# EAGLE board masterV05a (EAGLE 6.1), part 1 of 2
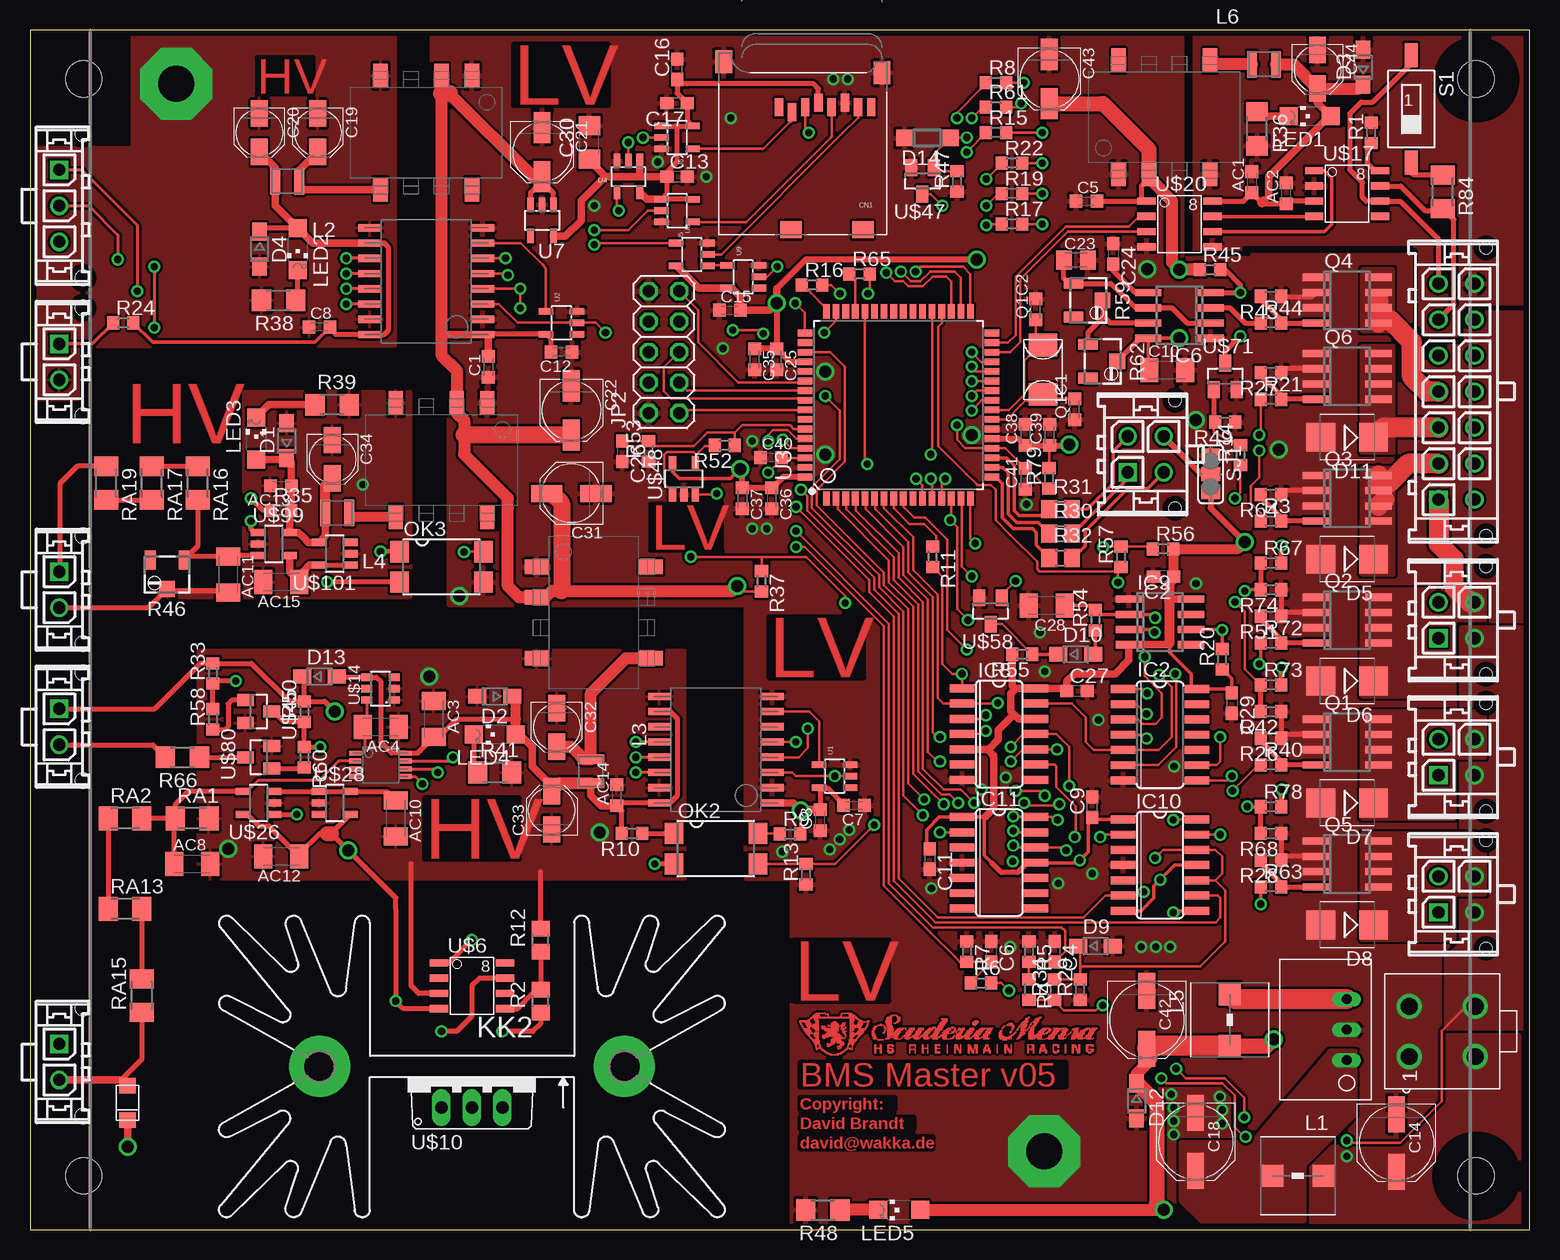
[diagram p0: board, top side]
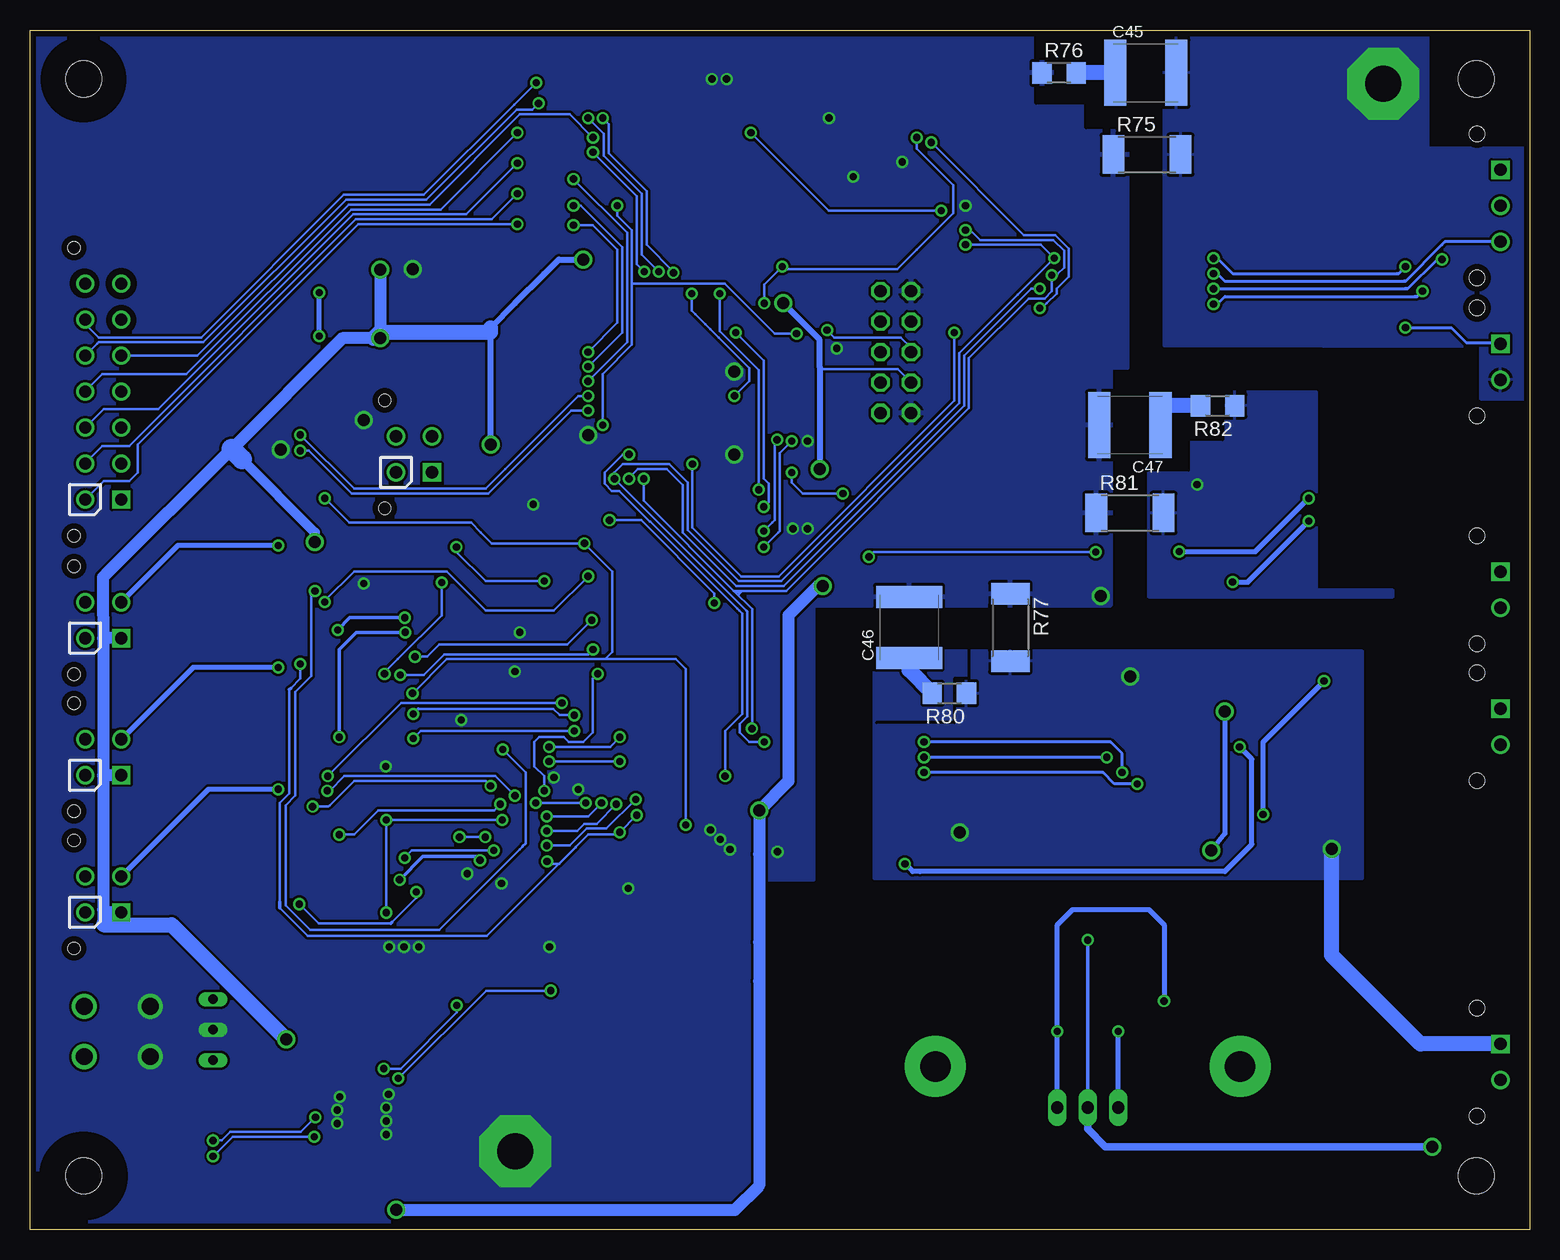
[diagram p1: board, bottom side, seen from below]

Size 124.98 x 100 mm. Coordinates in mm from the lower left corner, seen from the top.
Outline: 0,0 124.98,0 124.98,100 0,100 0,0
Copper layers (1*16): Top 0.035mm / dielectric 1.5mm / Bottom 0.035mm
Design rules: minimum track width 8mil, minimum drill 0.6mm, track to track 8mil, track to pad 8mil, pad to pad 8mil, via to via 8mil, smd to smd 0mil, copper to edge 20mil, drill to drill 10mil, minimum pad ring 8mil, minimum via ring 8mil, stop-mask expansion 0mil, vias tented up to drill 0mil, thermal gap 10mil
Holes 3 mm at 4.47,4.47 120.5,4.47 120.5,95.91 4.47,95.91
tRestrict: area 0.9,0.9 to 8,8; area 0.9,92.3 to 8,99.4; area 117.1,92.5 to 124,99.3; area 117,0.9 to 124.1,8; 12 lines
bRestrict: area 0.9,0.9 to 8,8; area 0.9,92.3 to 8,99.4; area 117.1,92.5 to 124,99.3; area 117,0.9 to 124.1,8; area 116.3,74.8 to 118.4,76.9; area 116.3,77.8 to 118.5,80; area 119.4,77.8 to 121.5,79.9; 19 lines

## Footprints (pad centres in the part's own frame; a part is rotated, then mirrored left to right if it is on the bottom)
C0603K = smd 1.05 x 1.08: 1 -0.875,0; 2 0.875,0
C1206K = smd 1.5 x 2: 1 -1.5,0; 2 1.5,0
C0603 = smd 1.1 x 1: 1 -0.85,0; 2 0.85,0
PANASONIC_D = smd 3 x 1.4: + 2.4,0; - -2.4,0
PANASONIC_B = smd 2.2 x 1.4: + 1.6,0; - -1.6,0
PANASONIC_C = smd 2.6 x 1.4: + 2.05,0; - -2.05,0
C0805K = smd 1.3 x 1.6: 1 -1,0; 2 1,0
C1206 = smd 1.6 x 1.8: 1 -1.4,0; 2 1.4,0
C2220K = smd 1.85 x 5.5: 1 -2.55,0; 2 2.55,0
MICROSD = smd 0.7 x 1.5: 1 9,-10.64; 2 7.9,-10.24; 3 6.8,-10.64; 4 5.7,-11.04; 5 4.6,-10.64; 6 3.5,-11.04; 7 2.4,-10.64; 8 1.3,-10.64 | smd 1.8 x 1.4: CD1 2,-0.44; CD2 8,-0.44 | smd 1.4 x 1.9: MT1 0.4,-13.54; MT2 13.6,-14.44
SOD323-W = smd 1.5 x 1.2: A 1.45,0; C -1.45,0
SMB = smd 2.4 x 2.4: A 2.2,0; C -2.2,0
SOD123 = smd 1.4 x 1.4: A 1.9,0; C -1.9,0
DO-219AB = smd 1.3 x 1.4: A -1.45,0; C 1.45,0
ISF = smd 1.2 x 2: 1 -3.81,-4.75; 2 -1.27,-4.75; 4 3.81,-4.75; 5 3.81,4.75; 8 -3.81,4.75
SO14 = smd 0.66 x 2.032: 1 -3.81,-3.073; 2 -2.54,-3.073; 3 -1.27,-3.073; 4 0,-3.073; 5 1.27,-3.073; 6 2.54,-3.073; 7 3.81,-3.073; 8 3.81,3.073; 9 2.54,3.073; 10 1.27,3.073; 11 0,3.073; 12 -1.27,3.073; 13 -2.54,3.073; 14 -3.81,3.073
SO08 = smd 0.6 x 2.2: 1 -1.905,-2.6; 2 -0.635,-2.6; 3 0.635,-2.6; 4 1.905,-2.6; 5 1.905,2.6; 6 0.635,2.6; 7 -0.635,2.6; 8 -1.905,2.6
2X05 = drill 1.016 octagon: 1 -5.08,-1.27; 2 -5.08,1.27; 3 -2.54,-1.27; 4 -2.54,1.27; 5 0,-1.27; 6 0,1.27; 7 2.54,-1.27; 8 2.54,1.27; 9 5.08,-1.27; 10 5.08,1.27
SK129 = drill 2.54 pad 5.08: A2,5 -12.7,-0.889; B2,5 12.7,-0.889
WE-PD_6033/6050_PLASTIC_BASE = smd 1.9 x 1.85: 1 -2.18,0; 2 2.18,0
WE-PMI_1008 = smd 0.8 x 2.2: 1 -1,0; 2 1,0
CHIPLED_1206 = smd 1.5 x 1.5: A 0,-1.75; C 0,1.75
SMD4 = smd 1.78 x 1.55: 1 -1.27,-3.5; 2 1.27,-3.5; 3 1.27,3.5; 4 -1.27,3.5
SO-08 = smd 0.6 x 2.2: 1 -1.905,-2.6; 2 -0.635,-2.6; 3 0.635,-2.6; 4 1.905,-2.6; 5 1.905,2.6; 6 0.635,2.6; 7 -0.635,2.6; 8 -1.905,2.6
R0603 = smd 1 x 1.1: 1 -0.85,0; 2 0.85,0
R0805 = smd 1.3 x 1.5: 1 -0.95,0; 2 0.95,0
R1206 = smd 1.6 x 1.803: 1 -1.422,0; 2 1.422,0
3223W = smd 0.9 x 1.6: 1 -1.4,-1.215; 3 1.4,-1.215 | smd 1.3 x 1.3: 2 0,1.215
R2512 = smd 1.8 x 3.2: 1 -2.8,0; 2 2.8,0
M1206 = smd 1.6 x 2: 1 -1.4,0; 2 1.4,0
SMS-001 = smd 1.092 x 2.007: 1 0,-4.496; 2 0,4.496
SJ_2 = smd 1.168 x 1.6: 1 -1.524,0; 2 0,0; 3 1.524,0
SOT23-5 = smd 0.55 x 1.2: 1 -0.95,-1.3; 2 0,-1.3; 3 0.95,-1.3; 4 0.95,1.3; 5 -0.95,1.3
TQFP64-0.8MM = smd 1.194 x 0.559: 1 -7.8,6; 2 -7.8,5.2; 3 -7.8,4.4; 4 -7.8,3.6; 5 -7.8,2.8; 6 -7.8,2; 7 -7.8,1.2; 8 -7.8,0.4; 9 -7.8,-0.4; 10 -7.8,-1.2; 11 -7.8,-2; 12 -7.8,-2.8; 13 -7.8,-3.6; 14 -7.8,-4.4; 15 -7.8,-5.2; 16 -7.8,-6; 33 7.8,-6; 34 7.8,-5.2; 35 7.8,-4.4; 36 7.8,-3.6; 37 7.8,-2.8; 38 7.8,-2; 39 7.8,-1.2; 40 7.8,-0.4; 41 7.8,0.4; 42 7.8,1.2; 43 7.8,2; 44 7.8,2.8; 45 7.8,3.6; 46 7.8,4.4; 47 7.8,5.2; 48 7.8,6 | smd 0.559 x 1.194: 17 -6,-7.8; 18 -5.2,-7.8; 19 -4.4,-7.8; 20 -3.6,-7.8; 21 -2.8,-7.8; 22 -2,-7.8; 23 -1.2,-7.8; 24 -0.4,-7.8; 25 0.4,-7.8; 26 1.2,-7.8; 27 2,-7.8; 28 2.8,-7.8; 29 3.6,-7.8; 30 4.4,-7.8; 31 5.2,-7.8; 32 6,-7.8; 49 6,7.8; 50 5.2,7.8; 51 4.4,7.8; 52 3.6,7.8; 53 2.8,7.8; 54 2,7.8; 55 1.2,7.8; 56 0.4,7.8; 57 -0.4,7.8; 58 -1.2,7.8; 59 -2,7.8; 60 -2.8,7.8; 61 -3.6,7.8; 62 -4.4,7.8; 63 -5.2,7.8; 64 -6,7.8
SOT23-DBV = smd 0.55 x 1.2: 1 -0.95,-1.3; 2 0,-1.3; 3 0.95,-1.3; 4 0.95,1.3; 5 -0.95,1.3
SO-8 = smd 1.524 x 0.61: 1 -2.743,1.905; 2 -2.743,0.635; 3 -2.743,-0.635; 4 -2.743,-1.905; 5 2.743,-1.905; 6 2.743,-0.635; 7 2.743,0.635; 8 2.743,1.905
SO16WB = smd 1.9 x 0.6: P$1 -4.7,4.445; P$2 -4.7,3.175; P$3 -4.7,1.905; P$4 -4.7,0.635; P$5 -4.7,-0.635; P$6 -4.7,-1.905; P$7 -4.7,-3.175; P$8 -4.7,-4.445; P$9 4.7,-4.445; P$10 4.7,-3.175; P$11 4.7,-1.905; P$12 4.7,-0.635; P$13 4.7,0.635; P$14 4.7,1.905; P$15 4.7,3.175; P$16 4.7,4.445
TO220V = drill 1.016 long: 1 -2.54,-2.54; 2 0,-2.54; 3 2.54,-2.54
SOT23-6 = smd 0.6 x 0.9: 1 -0.95,-1.15; 2 0,-1.15; 3 0.95,-1.15; 4 0.95,1.15; 5 0,1.15; 6 -0.95,1.15
MS8 = smd 1.016 x 0.406: P$1 -2.108,0.975; P$2 -2.108,0.325; P$3 -2.108,-0.325; P$4 -2.108,-0.975; P$5 2.108,-0.975; P$6 2.108,-0.325; P$7 2.108,0.325; P$8 2.108,0.975
SOT23-5' = smd 0.6 x 1.2: 1 -0.95,-1.306; 2 0,-1.306; 3 0.95,-1.306; 4 0.95,1.306; 5 -0.95,1.306
SOT23 = smd 1 x 1.4: 1 -0.95,-1.1; 2 0.95,-1.1; 3 0,1.1
TSR1 = drill 0.8 long: 1 -2.54,0; 2 0,0; 3 2.54,0
43650-0215 = drill 1.02 square: 1 1.5,0 | drill 1.02: 2 -1.5,0 | hole 1.27: 4.5,-1.96; -4.5,-1.96
43045-1412 = drill 1.02 square: 1 9,0 | drill 1.02: 2 6,0; 3 3,0; 4 0,0; 5 -3,0; 6 -6,0; 7 -9,0; 8 9,3; 9 6,3; 10 3,3; 11 0,3; 12 -3,3; 13 -6,3; 14 -9,3 | hole 1.02: 12,3.94; -12,3.94
43045-0412 = drill 1.02 square: 1 1.5,0 | drill 1.02: 2 -1.5,0; 3 1.5,3; 4 -1.5,3 | hole 1.02: 4.5,3.94; -4.5,3.94
43650-0315 = drill 1.02 square: 1 3,0 | drill 1.02: 2 0,0; 3 -3,0 | hole 1.27: 6,-1.96; -6,-1.96
5566-04 = drill 1.4: P1 -2.1,2.75; P2 2.1,2.75; P3 -2.1,-2.75; P4 2.1,-2.75
CX-53G = smd 1.9 x 2.4: P$1 -2.05,0; P$2 2.05,0

## Placement (x,y rotation side)
AC1  100n  [C0603K]  101.82,87.31 90 top
AC2  100n  [C0603K]  104.68,86.36 90 top
AC3  1u  [C1206K]  33.66,42.55 270 top
AC4  10u  [C1206K]  29.21,41.91 180 top
AC8  10u  [C1206K]  13.51,30.48 0 top
AC10  10u  [C1206K]  30.48,34.29 270 top
AC11  10u  [C1206K]  16.51,54.61 270 top
AC12  10u  [C1206K]  20.95,31.11 180 top
AC13  100n  [C0603K]  20.9,62 180 top
AC14  100n  [C0603K]  48.9,36.2 90 top
AC15  10u  [C1206K]  20.95,53.98 180 top
C1  100n  [C0603K]  38.2,71.93 90 top
C2  1u  [C0603]  94.47,54.46 180 top
C3  100n  [C0603K]  65.84,34.14 90 top
C4  1u  [C0603]  85.38,23.16 270 top
C5  100n  [C0603K]  88.04,85.72 0 top
C6  1u  [C0603]  80.1,23.16 270 top
C7  100n  [C0603K]  68.68,35.36 180 top
C8  100n  [C0603K]  24.13,75.25 0 top
C9  1u  [C0603]  88.53,35.21 90 top
C10  10u  [C1206K]  94.77,71.63 0 top
C11  1u  [C0603]  74.96,30.89 270 top
C12  100n  [C0603K]  44.3,73.15 180 top
C13  100n  [C0603]  53.93,87.78 0 top
C14  22u50v  [PANASONIC_D]  113.87,7.21 270 top
C15  100n  [C0603K]  58.32,76.63 0 top
C16  100n  [C0603]  53.93,96.72 90 top
C17  100n  [C0603]  53.93,93.88 180 top
C18  22u50v  [PANASONIC_D]  97.13,7.32 270 top
C19  10u16V  [PANASONIC_B]  23.98,91.44 270 top
C20  10u16V  [PANASONIC_B]  19.1,91.44 270 top
C21  33u10V  [PANASONIC_C]  42.67,89.81 270 top
C22  33u10V  [PANASONIC_C]  45.11,68.28 270 top
C23  1u  [C0805K]  87.16,80.82 0 top
C24  10n  [C0603]  90.26,81.34 270 top
C25  100n  [C0603K]  62.22,72.54 270 top
C26  1u  [C0603]  49.36,64.87 270 top
C27  1u  [C0603]  87.26,44.91 0 top
C28  2.2u  [C1206K]  84.72,52.02 180 top
C29  1u  [C0603]  100.16,43.89 270 top
C30  10u  [C1206]  46.61,90.63 90 top
C31  33u10V  [PANASONIC_C]  45.11,61.37 180 top
C32  10u16V  [PANASONIC_B]  43.89,41.86 270 top
C33  10u16V  [PANASONIC_B]  43.48,34.95 90 top
C34  10u16V  [PANASONIC_B]  25.2,64.21 270 top
C35  1u  [C0603K]  60.39,72.54 270 top
C36  100n  [C0603K]  61.81,60.96 270 top
C37  1u  [C0603K]  59.37,60.96 270 top
C38  100n  [C0603K]  82.94,66.24 90 top
C39  1u  [C0603K]  84.97,66.24 90 top
C40  1u  [C0603K]  61.76,64.36 0 top
C41  100n  [C0603K]  82.94,62.59 90 top
C42  150u10v  [PANASONIC_D]  93.07,17.48 270 top
C43  33u10V  [PANASONIC_C]  84.94,95.91 270 top
C44  10u16V  [PANASONIC_B]  107.29,96.72 270 top
C45  DNP  [C2220K]  32,96.42 0 bottom
C46  [C2220K]  51.71,50.19 90 bottom
C47  [C2220K]  33.32,67.06 180 bottom
CN1  [MICROSD]  71.4,82.91 180 top
D1  5.5  [SOD323-W]  21.39,65.76 90 top
D2  5.5  [SOD323-W]  38.73,44.45 180 top
D3  5.5  [SOD323-W]  111.1,96.89 90 top
D4  5.5  [SOD323-W]  19.13,81.74 270 top
D5  [SMB]  109.76,55.88 180 top
D6  [SMB]  109.76,45.72 180 top
D7  [SMB]  109.76,35.56 180 top
D8  [SMB]  109.76,25.4 180 top
D9  5.1  [SOD323-W]  88.8,23.64 0 top
D10  [SOD323-W]  87.15,47.96 0 top
D11  [SMB]  109.76,66.04 180 top
D12  5.5  [SOD323-W]  92.22,10.72 270 top
D13  [SOD323-W]  24.13,46.1 0 top
D14  20V  [SOD123]  74.78,91 180 top
D15  RS07J  [DO-219AB]  8.13,10.57 270 top
DC2  TES 1-0511  [ISF]  94.52,92.71 0 top
DC3  TES 1-0511  [ISF]  33.02,91.44 180 top
DC4  TES 1-0511  [ISF]  34.29,64.14 180 top
DC5  TES 1-0511  [ISF]  46.99,51.44 270 top
IC2  74AC04D  [SO14]  94.16,41.25 270 top
IC6  NE555D  [SO08]  95.79,76.2 90 top
IC8  4082D  [SO14]  80.75,41.3 270 top
IC9  NE555D  [SO08]  94.16,50.65 270 top
IC10  74AC11074D  [SO14]  94.16,30.38 270 top
IC11  74AC11074D  [SO14]  80.75,30.58 270 top
JP2  [2X05]  52.83,73.15 90 top
KK2  SK129-PAD  [SK129]  36.83,12.7 180 top
L1  7447786008  [WE-PD_6033/6050_PLASTIC_BASE]  105.66,4.47 180 top
L2  74479887310  [WE-PMI_1008]  21.44,87.38 180 top
L3  74479887310  [WE-PMI_1008]  46.74,38.2 270 top
L4  74479887310  [WE-PMI_1008]  25.6,59.74 180 top
L5  7447786008  [WE-PD_6033/6050_PLASTIC_BASE]  99.97,17.48 270 top
L6  74479887310  [WE-PMI_1008]  102.82,97.13 0 top
LED1  1318255  [CHIPLED_1206]  106.65,92.81 90 top
LED2  1318255  [CHIPLED_1206]  22.3,81.74 180 top
LED3  1318255  [CHIPLED_1206]  18.85,65.94 0 top
LED4  1318255  [CHIPLED_1206]  38.73,41.27 90 top
LED5  1318255  [CHIPLED_1206]  72.42,1.63 90 top
OK2  LTV816S  [SMD4]  57.15,31.75 270 top
OK3  LTV816S  [SMD4]  34.29,55.24 270 top
Q1  [SO-08]  109.76,40.64 270 top
Q1C1  18pf  [C0603K]  87.06,68.38 90 top
Q1C2  18pf  [C0603K]  83.81,76.71 90 top
Q2  [SO-08]  109.76,50.8 270 top
Q3  [SO-08]  109.76,60.96 270 top
Q4  [SO-08]  109.76,77.47 270 top
Q5  [SO-08]  109.76,30.48 270 top
Q6  [SO-08]  109.76,71.12 270 top
R1  1.5k  [R0603]  111.76,91.41 90 top
R2  [R0805]  42.55,19.05 90 top
R3  10  [R0603]  103.41,59.05 0 top
R4  4.7k  [R0603]  83.25,20.02 270 top
R5  680  [R0603]  83.25,23.16 270 top
R6  4.7k  [R0603]  79.25,20.56 0 top
R7  680  [R0603]  78.07,23.16 270 top
R8  1k  [R0603]  80.5,95.61 0 top
R9  100  [R0603]  63.35,32.97 0 top
R10  330  [R0603]  50.16,33.02 180 top
R11  100k  [R0603]  75.22,56.08 270 top
R12  [R0805]  42.55,24.13 90 top
R13  10k  [R0603]  64.67,29.62 90 top
R14  10k  [R0603]  100.87,64.56 90 top
R15  1k  [R0603]  80.5,91.44 0 top
R16  100k  [R0603]  65.16,78.74 0 top
R17  1k  [R0603]  81.82,83.82 0 top
R19  1k  [R0603]  81.82,86.36 0 top
R20  100k  [R0603]  99.35,47.55 90 top
R21  10  [R0603]  103.41,69.22 0 top
R22  1k  [R0603]  81.82,88.9 0 top
R24  1k  [R0603]  7.77,75.58 0 top
R26  470  [R0603]  103.41,40.96 180 top
R27  470  [R0603]  103.41,71.44 180 top
R28  470  [R0603]  103.41,30.8 180 top
R29  10k  [R0603]  87.51,20.02 90 top
R30  220  [R0805]  85.89,58.01 0 top
R31  220  [R0805]  85.89,60.05 0 top
R32  220  [R0805]  85.89,55.98 0 top
R33  10k  [R0603]  15.24,46.35 90 top
R34  10k  [R0603]  85.38,20.02 90 top
R35  330  [R0603]  20.9,59.94 0 top
R36  140  [R1206]  102.26,91.76 270 top
R37  10k  [R0603]  60.96,54.05 270 top
R38  140  [R1206]  20.71,77.47 180 top
R39  140  [R1206]  25.17,68.76 0 top
R40  10  [R0603]  103.41,38.73 0 top
R41  140  [R1206]  38.73,38.1 0 top
R42  1k  [R0603]  103.41,43.18 180 top
R43  470  [R0603]  103.41,77.79 180 top
R44  10  [R0603]  103.41,75.56 0 top
R45  1k  [R0603]  98.33,80.01 0 top
R46  100k  [3223W]  11.43,54.61 180 top
R47  100  [R0603]  77.25,87.38 90 top
R48  140  [R1206]  66.07,1.63 180 top
R49  100k  [R0603]  99.6,67.31 180 top
R50  10k  [R0603]  22.86,43.18 90 top
R51  470  [R0603]  103.41,51.12 180 top
R52  1k  [R0603]  57.9,65.38 180 top
R53  NTC1k  [R0603]  51.55,64.87 90 top
R54  100  [R0603]  88.78,50.8 90 top
R55  100k  [R0603]  82.68,47.96 180 top
R56  100k  [R0603]  94.42,56.74 0 top
R57  1k  [R0603]  90.92,56.08 90 top
R58  1k  [R0603]  15.24,42.55 90 top
R59  500k  [3223W]  88.17,77.47 270 top
R60  1k  [R0603]  22.86,39.37 270 top
R61  1k  [R0603]  80.5,93.57 0 top
R62  5k  [3223W]  89.39,72.39 270 top
R63  10  [R0603]  103.41,28.57 0 top
R64  470  [R0603]  103.41,61.28 180 top
R65  100k  [R0603]  69.12,79.65 0 top
R66  470  [R1206]  12.7,39.37 180 top
R67  100  [R0603]  103.41,55.56 0 top
R68  1k  [R0603]  103.41,33.02 180 top
R72  10  [R0603]  103.41,48.9 0 top
R73  100  [R0603]  103.41,45.4 0 top
R74  10k  [R0603]  103.41,53.34 180 top
R75  DNP  [R2512]  31.9,89.61 0 bottom
R76  DNP  [R1206]  39.22,96.42 0 bottom
R77  [R2512]  43.28,50.19 270 bottom
R78  100  [R0603]  103.41,35.24 0 top
R79  10k  [R0603]  84.92,62.64 90 top
R80  [R1206]  48.36,44.7 180 bottom
R81  [R2512]  33.32,59.74 0 bottom
R82  [R1206]  26.01,68.68 180 bottom
R84  120  [M1206]  117.74,86.51 270 top
RA1  10k  [M1206]  13.51,34.29 0 top
RA2  330k  [M1206]  7.92,34.29 0 top
RA13  330k  [M1206]  7.92,26.72 0 top
RA15  330k  [M1206]  9.3,19.51 90 top
RA16  330k  [M1206]  13.97,62.23 270 top
RA17  330k  [M1206]  10.16,62.23 270 top
RA19  330k  [M1206]  6.35,62.23 270 top
S1  SWS001  [SMS-001]  115.1,93.42 180 top
SJ1  [SJ_2]  98.39,62.99 270 top
U1  [SOT23-5]  67.06,37.8 90 top
U2  [SOT23-5]  44.3,75.59 90 top
U3  AT90CAN128-16AI  [TQFP64-0.8MM]  72.37,68.73 90 top
U4  SN74AHC1G126DBVR  [SOT23-5]  49.86,87.78 180 top
U5  SN74AHC1G126DBVR  [SOT23-5]  53.93,84.94 270 top
U6  SN74AHC1G126DBVR  [SOT23-5]  53.93,91.03 270 top
U7  LP2985-33DBVR  [SOT23-DBV]  42.67,84.12 180 top
U8  SN74AHC1G126DBVR  [SOT23-5]  55.15,81.28 90 top
U9  [SOT23-5]  59.44,79.43 90 top
U$6  LR645  [SO-8]  36.83,20.32 0 top
U$9  ADUM1401  [SO16WB]  33.02,79.06 180 top
U$10  DN2540TO220  [TO220V]  36.83,12.7 0 top
U$11  ADUM1301  [SO16WB]  57.15,40.01 180 top
U$14  LT6656  [SOT23-6]  29.21,45.09 90 top
U$16  LTC1864  [MS8]  29.21,38.73 0 top
U$17  MCP2551  [SO-8]  109.76,86.36 0 top
U$20  ADUM1201  [SO-8]  95.79,83.82 0 top
U$26  LT1716  [SOT23-5']  19.05,35.56 90 top
U$28  LT6650  [SOT23-5']  25.4,35.56 270 top
U$45  2N7002  [SOT23]  19.05,43.18 270 top
U$47  2N7002  [SOT23]  74.37,87.41 180 top
U$48  LT1782  [SOT23-5']  54.49,62.59 0 top
U$50  TSR1  [TSR1]  109.73,16.66 90 top
U$58  2N7002  [SOT23]  80.05,51.56 180 top
U$71  2N7002  [SOT23]  99.6,71.12 0 top
U$80  2N7002  [SOT23]  19.05,39.37 90 top
U$99  LT1716  [SOT23-5']  20.32,57.15 270 top
U$101  LT6650  [SOT23-5']  25.4,56.34 90 top
U$1000  [SMLOGOS]  67.06,16.26 0 top
X1  [43650-0215]  2.44,13.97 90 top
X2  [43650-0215]  2.44,41.91 90 top
X3  [43045-1412]  117.38,69.85 270 top
X4  [43045-0412]  117.38,27.94 270 top
X5  [43045-0412]  117.38,39.37 270 top
X6  [43045-0412]  117.38,50.8 270 top
X7  [43650-0315]  2.44,85.34 90 top
X8  [43045-0412]  91.48,64.62 270 top
X9  [43650-0215]  2.44,53.34 90 top
X10  MINI-FIT-JR-045566  [5566-04]  117.7,16.51 90 top
X13  [43650-0215]  2.44,72.34 90 top
Y1  16Mhz  [CX-53G]  84.42,71.68 90 top

## Library data of the parts
AC1-AC4 AC8 AC10-AC15 C1-C13 C15-C17 C19-C41 C43-C47 Q1C1 Q1C2 R1-R17 R19-R22 R24 R26-R45 R47-R58 R60 R61 R63-R68 R72-R82 RA1 RA2 RA13 RA15-RA17 RA19 = rcl
C14 C18 C42 R84 = resistor
CN1 U1 U2 U4-U6 U8 U9 = microbuilder
D1-D14 = diode
D15 DC2-DC5 U$6 U$9-U$11 U$14 U$16 U$17 U$20 U$26 U$28 U$45 U$47 U$48 U$50 U$58 U$71 U$80 U$99 U$101 U$1000 = bms-hsrm
IC2 = 74xx-eu
IC6 IC9 = linear
IC8 = 40xx
IC10 IC11 = 74ac-logic
JP2 = pinhead
KK2 = heatsink
L1-L6 = EagleLibrary_Wuerth_Elektronik_eiSos_Version_6-12
LED1-LED5 = led
OK2 OK3 = optocoupler; OC_FARNELL: unknown; OC_NEWARK: unknown
Q1-Q6 = transistor-power
R46 R59 R62 = pot
S1 = smd-special
SJ1 = jumper
U3 = _hhn_at90can32_64_128_v2
U7 = SmartPrj
X1-X9 X13 = con-molex-micro-fit-3_0
X10 = con-molex-minifitjr
Y1 = crystal

## Nets
40VOUT: OK2.2 R50.1 R60.1 U$45.3
!40VCOUT: R66.1 U$80.3
!40VCOUTW: R33.1 R58.2 U$26.1
!ANDOUT2: D10.C R55.1 U$58.3
!CSADC: U1.2 U3.37 U$11.P$3
!CSLT: U2.2 U3.44 U$9.P$3
!PRECH_C: IC2.3 OK3.4 R37.1 U3.14
!RELAI+_C: IC2.6 R57.1 U3.36
!RELAI+_CC: IC2.9 IC9.3
!RESET: C41.2 JP2.6 R79.1 U3.20 U$47.3
!SDCS: U3.49 U6.2 U9.2
!SDCS3: CN1.2 U6.4
+3V3: C13.1 C16.1 C17.1 C30.1 CN1.4 U4.1 U4.5 U5.1 U5.5 U6.1 U6.5 U7.5
+5V: C1.2 C2.1 C3.2 C5.2 C7.2 C9.1 C10.1 C11.1 C12.2 C15.2 C21.+ C22.+ C25.1 C27.1 C29.1 C31.+ C35.1 C36.1 C37.1 C38.1 C39.1 C42.+ C43.+ D12.C DC2.2 DC3.2 DC4.2 DC5.2 IC2.14 IC6.8 IC8.5 IC8.12 IC8.14 IC9.4 IC9.8 IC10.1 IC10.7 IC10.11 IC11.1 IC11.11 JP2.4 L5.2 LED5.A R9.2 R20.1 R37.2 R45.1 R55.2 R56.2 R62.2 R79.2 SJ1.3 U1.5 U2.5 U3.21 U3.52 U3.64 U7.1 U7.3 U8.5 U9.5 U$9.P$1 U$11.P$1 U$20.1 U$48.5 X4.1 X5.1 X6.1
+5VL: L5.1 U$50.3
ANDOUTD: D10.A R54.1
AREF: C40.2 U3.62 U$48.3
AREFP: R52.2 U$48.1 U$48.4
AVREF3: AC15.1 U$99.4 U$101.1 U$101.5
AVREF400MV: AC10.1 U$26.3 U$28.1 U$28.5
B40V: IC2.2 IC8.3
B!40V: IC2.1 OK2.3 R13.2 R14.1 U3.16
B!40VE: OK2.4 R9.1
B+5V: AC3.2 AC14.1 C33.+ D2.C D13.A L3.2 LED4.A R10.2 U$11.P$10 U$11.P$16 U$14.4 U$16.P$8
B+5VL: C32.+ DC5.5 L3.1
B+12V: AC12.1 D13.C R2.1 R33.2 R50.2 U$6.4 U$10.3 U$26.5 U$28.4 X2.1
BACONV: U$11.P$14 U$16.P$5
BASCK: U$11.P$13 U$16.P$7
BASDO: U$11.P$12 U$16.P$6
BAT: D15.A RA15.1 X1.2
BATD: D15.C U$6.1 U$10.2
BATM: AC8.1 RA1.1 RA2.2 U$16.P$2 U$26.4
BATM1: RA2.1 RA13.1
BATM3: RA13.2 RA15.2
BGND: AC3.1 AC4.1 AC8.2 AC10.2 AC12.2 AC14.2 C32.- C33.- D2.A DC5.4 R12.2 R41.2 R77.2 R80.1 RA1.2 U$6.3 U$11.P$9 U$11.P$15 U$14.1 U$14.2 U$16.P$3 U$16.P$4 U$26.2 U$28.2 U$45.2 U$80.2 X1.1
BMSRESET: D14.C R47.2 U$47.1 X3.5
C1RS: R1.1 U$17.8
CAN+5V: AC1.1 AC2.1 C44.+ D3.C L6.2 LED1.A U$17.3 U$20.8
CAN+5VL: DC2.5 L6.1
CAN_RX: U3.31 U$20.2
CAN_TX: U3.30 U$20.3
CANGND: AC1.2 AC2.2 C44.- D3.A DC2.4 R1.2 R36.2 U$17.2 U$20.5 X3.14
CANH: R84.2 U$17.7 X3.6
CANL: S1.1 U$17.6 X3.7
CANM: R84.1 S1.2
CM+5V: AC13.1 C34.+ D1.C L4.2 LED3.A R35.2 U$99.5 U$101.4
CM+5VL: DC4.5 L4.1
CMGND: AC11.2 AC13.2 AC15.2 C34.- D1.A DC4.4 R39.2 R46.2 R81.2 R82.1 U$99.2 U$101.2 X9.2
CSADC: U1.4 U$11.P$7
CSLT: U2.4 U$9.P$7
CURR: RA19.1 X9.1
CURRM: AC11.1 R46.1 RA16.2 U$99.3
CURRM4: RA16.1 RA17.1
CURRM7: RA17.2 RA19.2
DISCHARGE: D6.C Q2.5 Q2.6 Q2.7 Q2.8 X3.1 X6.4
FFCLK: IC10.8 IC10.14 IC11.14 U3.3
GND: C1.1 C2.2 C3.1 C4.1 C5.1 C6.1 C7.1 C9.2 C10.2 C11.2 C12.1 C13.2 C14.- C15.1 C16.2 C17.2 C18.- C21.- C22.- C23.2 C24.1 C25.2 C26.2 C27.2 C28.2 C29.2 C30.2 C31.- C35.2 C36.2 C37.2 C38.2 C39.2 C40.1 C41.1 C42.- C43.- C46.2 C47.2 CN1.6 CN1.MT1 CN1.MT2 D5.A D6.A D7.A D8.A D9.A D11.A D12.A D14.A DC2.1 DC3.1 DC4.1 DC5.1 IC2.7 IC6.1 IC8.7 IC9.1 IC10.4 IC11.4 JP2.2 JP2.10 OK3.3 Q1.1 Q1.2 Q1.3 Q1C1.1 Q1C2.2 Q2.1 Q2.2 Q2.3 Q3.1 Q3.2 Q3.3 Q4.1 Q4.2 Q4.3 Q5.1 Q5.2 Q5.3 Q6.1 Q6.2 Q6.3 R5.1 R7.1 R13.1 R26.1 R27.1 R28.1 R29.1 R42.1 R43.1 R47.1 R48.2 R49.1 R51.1 R53.1 R64.1 R68.1 R74.1 R75.1 R76.1 R77.1 R81.1 SJ1.1 U1.3 U2.3 U3.22 U3.53 U3.63 U4.3 U5.3 U6.3 U7.2 U8.3 U9.3 U$9.P$2 U$9.P$8 U$11.P$2 U$11.P$8 U$20.4 U$47.2 U$48.2 U$50.2 U$58.2 U$71.2 X10.P1 X10.P2
GPIO1: R17.2 X3.8
GPIO2/TX: R19.2 X3.9
GPIO3/RX: R22.2 X3.10
GPIO4: R15.2 X3.11
GPIO5: R61.2 X3.12
GPIO6: R8.2 X3.13
GPOC1: D5.C Q3.5 Q3.6 Q3.7 Q3.8 X3.2
GPOC2: D11.C Q6.5 Q6.6 Q6.7 Q6.8 X3.3
ISO_CAN_RX: U$17.4 U$20.7
ISO_CAN_TX: U$17.1 U$20.6
LR645_G: U$6.7 U$10.1
LR645_TRIM: R2.2 R12.1 U$6.5
MISO: U3.13 U8.4 U$9.P$6 U$11.P$5
MISO3: CN1.7 U8.2
MOSI: U3.12 U4.2 U$9.P$4
MOSI3: CN1.3 U4.4
N$8: R58.1 U$45.1
N$9: R60.2 U$80.1
N$11: R66.2 X2.2
NE555_TR: C28.1 IC9.2 IC9.6 R20.2 R54.2
OK2A: OK2.1 R10.1
OPTOLED: OK3.1 R35.1
OSC1: Q1C2.1 U3.24 Y1.P$2
OSC2: Q1C1.2 U3.23 Y1.P$1
PLEDC1: LED1.C R36.1
PLEDC2: LED2.C R38.1
PLEDC3: LED3.C R39.1
PLEDC4: LED4.C R41.1
PLEDC5: LED5.C R48.1
PRECH_C: IC2.4 IC8.4
PRECHARGEOPTO: OK3.2 U$99.1
REF-4.096: AC4.2 U$14.6 U$16.P$1
RELAI+: IC8.1 R11.2 R40.1
RELAI+12V: R4.2 R34.1 X4.3 X5.3 X6.3 X10.P4
RELAI+_AND: IC2.5 IC8.13 U3.9
RELAI+_CG: R56.1 R57.2 U$58.1
RELAI+_CLOSED_AP: R73.2 X5.2
RELAI+_DELAYED: IC2.8 IC8.2 U3.7
RELAI+CLOSED: R42.2 R73.1 U3.15
RELAI+FF: IC8.9 IC10.2
RELAI+G: Q1.4 R26.2 R40.2
RELAI+GND: D7.C Q1.5 Q1.6 Q1.7 Q1.8 X5.4
RELAI+S: R11.1 U3.8
RELAI-: IC10.6 R16.2 R63.1
RELAI-_CLOSED_AP: R78.2 X4.2
RELAI-CLOSED: IC8.11 R68.2 R78.1 U3.6
RELAI-G: Q5.4 R28.2 R63.2
RELAI-GND: D8.C Q5.5 Q5.6 Q5.7 Q5.8 X4.4
RELAI-R: R16.1 U3.48
RELAI_PD: IC11.2 R65.2 R72.1
RELAI_PDCLOSED: IC8.10 R67.1 R74.2 U3.5
RELAI_PDR: R65.1 U3.45
RELAI_VCC: U3.32
RELAI_VCC5: D9.C IC10.10 IC10.12 IC11.12 R29.2 R34.2 U3.51
RELAI_VCC_SENS: C4.2 R4.1 R5.2 U3.61
RELAIPD_CLOSED_AP: R67.2 X6.2
RELAIPDG: Q2.4 R51.2 R72.2
RELAIPDG1: Q3.4 R3.2 R64.2
RELAIPDG2: Q6.4 R21.2 R27.2
S!CSLT: U$9.P$14 X7.1
S+5V: C8.2 C20.+ D4.C L2.2 LED2.A R24.2 U$9.P$10 U$9.P$16
S+5VL: C19.+ DC3.5 L2.1
SCK: U3.11 U5.2 U$9.P$5 U$11.P$4
SCK3: CN1.5 U5.4
SDCS: U8.1 U9.4
SGND: C8.1 C19.- C20.- C45.2 D4.A DC3.4 R38.2 R75.2 U$9.P$9 U$9.P$15 X13.2
SGNDGND: C45.1 R76.2
SGNDGND1: C46.1 R80.2
SGNDGND2: C47.1 R82.2
SLEDB: R32.2 X8.3
SLEDG: R31.2 X8.2
SLEDPOW: SJ1.2 X8.4
SLEDR: R30.2 X8.1
SMISO: R24.1 U$9.P$11 X13.1
SMOSI: U$9.P$13 X7.2
SSCK: U$9.P$12 X7.3
TCK: JP2.1 U3.57
TDI: JP2.9 U3.54
TDO: JP2.3 U3.55
TEMPM: C26.1 R52.1 R53.2 U3.59
TMS: JP2.5 U3.56
TSAL: Q4.5 Q4.6 Q4.7 Q4.8 X3.4
TSAL!R: IC6.4 R45.2 U$71.3
TSALCV: C24.2 IC6.5
TSALDIS: IC6.7 R59.2 R62.1
TSALG: Q4.4 R43.2 R44.2
TSALGOUT: R14.2 R49.2 U$71.1
TSALPR: C23.1 IC6.2 IC6.6 R59.1
TSALQ: IC6.3 R44.1
UC_GPIO1: R17.1 U3.29
UC_GPIO2: R19.1 U3.28
UC_GPIO3: R22.1 U3.27
UC_GPIO4: R15.1 U3.33
UC_GPIO5: R61.1 U3.34
UC_GPIO6: R8.1 U3.35
UC_GPOC1: R3.1 U3.25
UC_GPOC2: R21.1 U3.26
UC_RELAI+: IC10.13 U3.4
UC_RELAI-: IC10.9 U3.47
UC_RELAI_PD: IC11.13 U3.2
UC_SLEDB: R32.1 U3.17
UC_SLEDG: R31.1 U3.19
UC_SLEDR: R30.1 U3.18
VCC: C14.+ L1.1 R6.2 X10.P3
VCC2: C18.+ L1.2 U$50.1
VCC_SENS: C6.2 R6.1 R7.2 U3.60